# Altium PCB board.PcbDoc (part 2 of 2)
Units mil, origin at the board's own origin, x right, y up, seen from the top; angles counter-clockwise.
Board outline 6805.03 x 3220.03 mil, 2 copper layers (Top Layer, Bottom Layer); 97 components, 65 nets, 363 pads, 68 vias.
Unrouted connection lines stored in the file: 1.
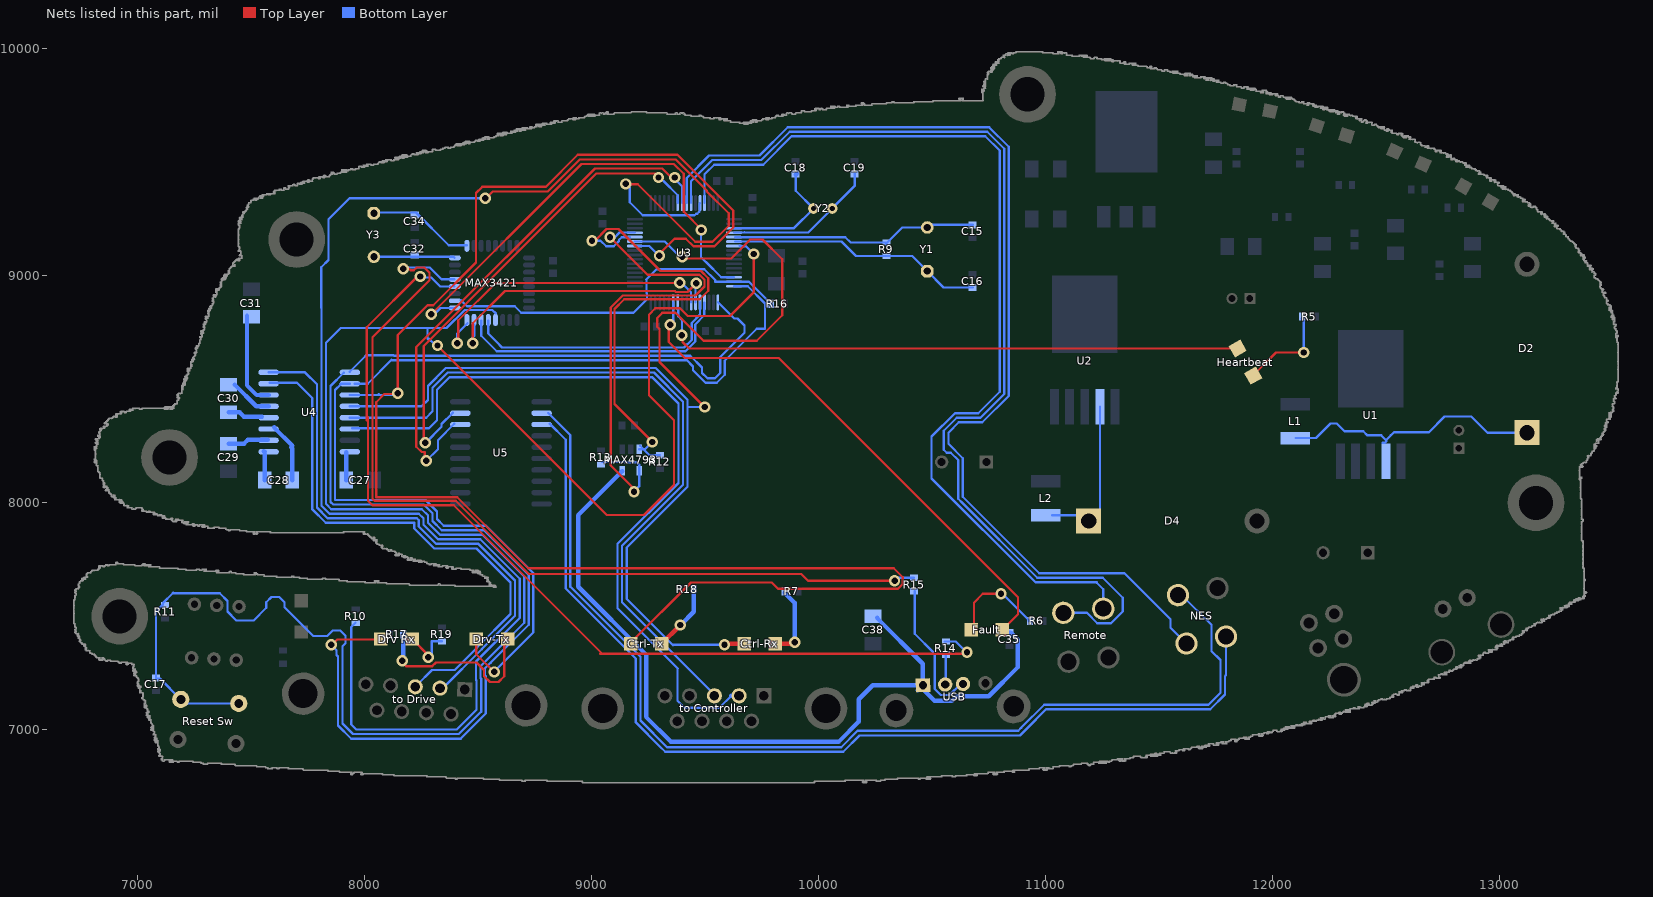
[diagram p2: the nets of this part, all layers, seen from the top]

## Via types
v1: diameter 50, hole 28, Top Layer to Bottom Layer, 68 vias

## Nets (pads, with @x,y where several pads share a name; then routed paths per layer and width w, separated by ;. In a path a pad name is that pad's centre, name@x,y a point inside that pad or via, vN(x,y) a via of type N, cw(c..) or ccw(c..) an arc to the next point about the centre after c; other vN are vias at no path point) (continued)
NetC15_2: C15.2 R9.1 U3.5 Y1.2 | length 1095.9
  Bottom Layer w10: U3.5@9631,9170 10117,9170 10140.47,9146.53 R9.1@10298,9146.53 ; R9.1@10297,9142 10368.06,9213.06 Y1.2@10474.06,9213.06 ; Y1.2@10474,9213 Y1.2@10474.06,9213.06 ; Y1.2@10478,9213.06 Y1.2@10474.06,9213.06 ; C15.2@10678,9224.56 10485.56,9224.56 Y1.2@10474.06,9213.06
NetC16_2: C16.2 R9.2 U3.6 Y1.1 | length 1133.5
  Bottom Layer w10: U3.6@9631,9151 10100,9151 10163.53,9087.47 R9.2@10298,9087.47 10411.53,9087.47 Y1.1@10480,9019 ; Y1.1@10478,9020.94 10549.94,8949 C16.2@10678,8949
NetC17_2: "Reset Sw.2" C17.2 MAX3421.12 R11.1 U3.7 | length 9159.5
  Top Layer w10: v1@8329,8683 9066,7946 9230,7946 9362,8078 9362,8364 9252,8474 9252,8829 9280,8857 9389,8857 9423,8823 9609,8823 9713,8927 v1(9713,9096)
  Bottom Layer w10: C17.2@7080,7227.56 7080,7521 7111,7552 7111,7559 7153.5,7601.5 ; C17.2@7085,7226 7097.36,7226 7189.29,7134.07 ; 7157,7605 7153.5,7601.5 ; 7213.78,7116.22 7444.57,7116.22 ; 7740.07,7446.07 7738.07,7448.07 ; 8281,8719 8276,8724 ; v1@8310,8696 8309,8696 8281,8724 8276,8724 ; 8578,8834 8562,8850 8440,8850 8360,8770 8276,8770 ; U3.7@9651,9133 9653,9131 9678,9131 v1(9713,9096) ; 7153.5,7601.5 7361.22,7601.5 7395.06,7567.66 7395.06,7520.94 7434,7482 7510.72,7482 7566,7537.28 7566,7561.57 7589.43,7585 7622.57,7585 7646,7561.57 7646,7540.13 7738.07,7448.07 ; 7738.07,7448.07 7772.57,7413.57 7834,7413.57 7858.43,7438 7891.57,7438 7915,7414.57 7915,7381.43 7901.84,7368.27 7901.84,7027.57 7948.29,6981.13 8413.84,6981.13 8512.44,7079.73 8512.44,7225.26 8510,7227.7 8510,7279.85 8702.16,7472.01 8702.16,7674.14 8517.14,7859.16 8331.14,7859.16 8278.16,7912.14 8278.16,7945.27 8251.2,7972.24 7852.43,7972.24 7829,7995.67 7829,8705 7894,8770 8276,8770 ; 8276,8724 8276,8770
  Bottom Layer w19.68: 7198,7132 7213.78,7116.22
  other v1: 8320,8693
NetC18_2: C18.2 U3.3 Y2.1 | length 566.2
  Bottom Layer w10: U3.3@9626.5,9210.27 9891.27,9210.27 Y2.1@9973,9292 ; C18.2@9899,9445 9899,9374.66 Y2.1@9976.66,9297
  Bottom Layer w19.68: C18.2@9899,9445 C18.2@9903,9449
NetC19_2: C19.2 U3.4 Y2.2 | length 678.7
  Bottom Layer w10: U3.4@9626.5,9190.58 9671.58,9190.58 ; 9665.91,9190.58 9671.58,9190.58 ; 9673,9192 9671.58,9190.58 ; Y2.2@10056,9294 10158,9396 C19.2@10158,9449.44 ; Y2.2@10057,9294 9953.58,9190.58 9671.58,9190.58
NetC28_1: C28.1 U4.1 | length 119.6
  Bottom Layer w19.68: U4.1@7555,8228 U4.1@7558.98,8224.02 ; C28.1@7558.98,8100 U4.1@7558.98,8214.02
NetC28_2: C28.2 U4.3 | length 261.7
  Bottom Layer w19.68: U4.3@7600,8332 7681.02,8250.98 ; 7676,8245 7681.02,8239.98 C28.2@7681.02,8100
NetC29_1: C29.1 U4.2 | length 180
  Bottom Layer w19.68: C29.1@7400,8261.02 7468.02,8261.02 7485,8278 U4.2@7573,8278
NetC30_1: C30.1 U4.4 | length 154.9
  Bottom Layer w19.68: C30.1@7400,8398.98 7448.02,8398.98 7467,8380 U4.4@7547,8380
NetC30_2: C30.2 U4.5 | length 189.6
  Bottom Layer w19.68: C30.2@7426,8521 7522,8425 U4.5@7575.87,8425
NetC31_2: C31.2 U4.6 | length 419.3
  Bottom Layer w19.68: C31.2@7481,8824 7481,8517 7523,8475 U4.6@7575.87,8475
NetC32_1: C32.1 MAX3421.24 Y3.2 | length 356.6
  Bottom Layer w10: Y3.2@8040,9083.94 8391.06,9083.94 MAX3421.24@8395,9080
NetC34_1: C34.1 MAX3421.25 Y3.1 | length 468.7
  Bottom Layer w10: Y3.1@8041,9279 8225,9279 8369.65,9134.35 MAX3421.25@8449.76,9134.35
NetC35_2: C35.2 C38.1 MAX4793.5 USB.1 | length 3803.5
  Bottom Layer w19.68: MAX4793.5@9134,8140 8940,7946 8940,7630.83 9239.09,7331.73 9239.09,7095 9239.09,7056.7 9347.48,6948.32 10088.78,6948.32 10176.69,7036.22 10176.69,7135 10237.65,7195.97 USB.1@10458.75,7195.97 ; C38.1@10257,7493 10458.75,7291.25 USB.1@10458.75,7195.97 ; USB.1@10436.33,7173.55 USB.1@10458.75,7195.97 ; USB.1@10454,7184 10509.93,7128.07 10586.67,7128.07 10606.67,7148.07 10749.26,7148.07 10877.56,7276.37 10877.56,7396.41 10846.41,7427.56 C35.2@10840,7427.56
NetCtrl-Rx_2: Ctrl-Rx.2 R7.2 | length 315.7
  Top Layer w19.68: Ctrl-Rx.2@9808.9,7380 9888,7380 v1@9889,7379
  Bottom Layer w19.68: R7.2@9850,7603 9894,7559 v1(9894,7386)
NetCtrl-Tx_2: Ctrl-Tx.2 R18.2 | length 295.4
  Top Layer w19.68: Ctrl-Tx.2@9308.9,7380 9387.9,7459 v1@9394,7459
  Bottom Layer w19.68: v1@9395,7465 9449.53,7519.53 R18.2@9449.53,7620
  other v1: 9390,7462
NetD2_2: D2.2 L1.1 U1.2 | length 1174
  Bottom Layer w10: L1.1@12100,8285.2 12190.2,8285.2 12255,8350 12281.88,8350 12316.28,8315.59 12398.99,8315.59 12417.43,8297.16 12477.84,8297.16 12500,8275 ; 12485,8265 12495,8265 12501,8271 12501,8278 12520.16,8297.16 12534.16,8311.16 12688.29,8311.16 12757.13,8380 12875,8380 12945.87,8309.13 D2.2@13120,8309.13
NetD4_2: D4.2 L2.1 U2.2 | length 596.2
  Bottom Layer w10: L2.1@11028,7945.2 D4.2@11170.2,7945.2 ; D4.2@11238.81,7968.81 U2.2@11238.81,8422.83
"NetDrv Rx_2": "Drv Rx.2" R19.2 | length 242.7
  Top Layer w10: 8208.9,7400 8281,7327.9 v1@8281,7314
  Bottom Layer w10: v1@8278,7316 8294.47,7332.47 8294.47,7390.47 R19.2@8340,7390.47
  other v1: 8280,7320
NetDrv-Tx_2: Drv-Tx.2 R17.2 | length 815.9
  Top Layer w10: v1@8163,7299 8182,7280 8296.57,7280 8313.57,7297 8491.87,7297 8525.16,7263.71 8525.16,7236.43 8551.43,7210.16 8588.57,7210.16 8614.84,7236.43 Drv-Tx.2@8614.84,7385.94
  Top Layer w19.68: Drv-Tx.2@8614.84,7385.94 Drv-Tx.2@8628.9,7400
  Bottom Layer w19.68: v1(8165,7305) 8169.53,7309.53 R17.2@8169.53,7420
NetFault_1: Fault.1 R6.1 | length 422.3
  Top Layer w10: Fault.1@10684,7446 10684,7560 10723,7599 v1(10803,7599)
  Bottom Layer w10: v1@10810,7598 v1@10810,7599 ; v1@10810,7600 v1@10810,7599 ; R6.1@10929,7480 v1@10810,7599
  Bottom Layer w19.68: v1@10809,7600 v1@10810,7599 ; R6.1@10929,7480 R6.1@10930.47,7480
NetFault_2: Fault.2 U3.27 | length 2351
  Top Layer w10: v1@9339,8779 9339,8709 9410,8638 9824,8638 10878,7584 10878,7509.1 Fault.2@10808.9,7440
  Bottom Layer w10: v1@9347,8785 9358.79,8796.79 U3.27@9358.79,8883.5
  other v1: 9346,8784
NetHeartbeat_1: Heartbeat.1 R5.1 | length 407.7
  Top Layer w10: Heartbeat.1@11921,8569 12014,8662 v1(12137,8662)
  Bottom Layer w10: R5.1@12127,8811 12137,8801 v1(12137,8662)
NetHeartbeat_2: Heartbeat.2 U3.26 | length 2600.1
  Top Layer w10: v1@9400,8733 9400,8709 9429.33,8679.67 Heartbeat.2@11836.33,8679.67
  Bottom Layer w10: U3.26@9381,8859 9381,8822 9397,8806 v1(9397,8738)
NetMAX3421_20: MAX3421.20 R14.1 | length 4314.6
  Top Layer w10: 8009,8363 8009,8774 v1@8239,9004 ; 8014,8377 8014,8009 8034,7989 8392,7989 9046,7335 ; 9037,7335 9046,7335 ; v1(10653,7342) 10646,7335 9046,7335
  Bottom Layer w10: v1@8252,8993 8293,8993 8332.75,8953.25 MAX3421.20@8394.65,8953.25 ; MAX3421.20@8388.08,8958.92 MAX3421.20@8390,8957 ; R14.1@10554,7389 10604,7389 10651,7342 v1(10653,7342)
  other v1: 8245,8997
NetMAX3421_21: MAX3421.21 R15.1 | length 4000.6
  Top Layer w10: v1@8181,9045 8201.85,9024.15 8215.58,9024.15 8228.43,9037 8261.57,9037 8285,9013.57 8285,8980.43 8034,8729.43 8034,8017.28 8042.28,8009 8400.28,8009 8722.64,7686.64 9923.36,7686.64 9953,7657 v1(10334,7657)
  Bottom Layer w10: v1@8174,9037 8286,9037 8338.25,8984.75 MAX3421.21@8394.65,8984.75 ; v1@10342,7662 10349.53,7669.53 R15.1@10420,7669.53
  other v1: 8170,9032
NetNES_1: NES.1 U3.57 | length 4680.3
  Bottom Layer w10: 9417,9427 9417,9429 ; U3.57@9417.84,9320.5 9417.84,9428.16 9417,9429 ; 10837,9532 10837,9527 ; NES.1@11620,7380 11550,7450 11550,7486.87 11347.08,7689.79 10971.12,7689.79 10634.53,8026.38 10634.53,8196.71 10571.16,8260.08 10571.16,8309.29 10616.71,8354.84 10720.75,8354.84 10837,8471.09 10837,9527 ; 9417,9429 9417,9430.28 9516.72,9530 9738.72,9530 9863.72,9655 10750.57,9655 10837,9568.57 10837,9527
NetNES_2: NES.2 U5.2 | length 4741.5
  Bottom Layer w10: U5.2@8808,8396 8904.84,8299.16 8904.84,7630.85 9214.25,7321.44 9214.25,7040.63 9331.41,6923.47 10099.07,6923.47 10170.92,6995.32 10378.88,6995.32 10379.56,6996 10879,6996 10892.63,7009.63 ; 10894.52,7012 10993.28,7110.76 11716.76,7110.76 11769.63,7163.63 11769.63,7307.18 11730.26,7346.55 11730.26,7462.74 NES.2@11599.75,7593.25
  Bottom Layer w19.68: NES.2@11582.4,7593.25 NES.2@11599.75,7593.25
NetNES_3: NES.3 U5.3 | length 4485
  Bottom Layer w10: U5.3@8814,8349 8884.84,8278.16 8884.84,7622.57 9194.25,7313.16 9194.25,7032.35 9300.8,6925.8 9323.13,6903.47 10107.36,6903.47 10179.21,6975.32 10886.6,6975.32 10912.63,7001.34 10912.63,7001.83 11001.56,7090.76 11725.05,7090.76 11789.63,7155.35 11789.63,7236.16 11794.47,7241 NES.3@11794.47,7410.76
NetR10_2: R10.2 U3.60 | length 7099.5
  Top Layer w10: v1@8533,9341 8564,9372 8805.72,9372 8946.72,9513 9369.85,9513 9507,9375.85 9507,9372 9603,9276 9603,9221 9532,9150 9456,9150 9202,9404 v1@9146,9404
  Bottom Layer w10: 7808,8860 7808,9038.01 7840,9070.01 7840,9249 7933,9342 v1(8530,9342) ; 7809,8874 7809,7987.38 7844.15,7952.24 8237.76,7952.24 8258.16,7931.84 8258.16,7903.86 8322.86,7839.16 8508.86,7839.16 8682.16,7665.86 8682.16,7492.87 8490,7300.72 8490,7219.42 8492.44,7216.98 8492.44,7088.01 8405.56,7001.13 7962,7001.13 7940,7023.13 7940,7453 R10.2@7959,7472 ; v1@9156,9402 9167,9391 9167,9324 9224.46,9266.54 9452.91,9266.54 9460.43,9274.07 9464.21,9274.07 9474.12,9283.97 9474.12,9317.72 U3.60@9476.9,9320.5
  other v1: 9150,9405
NetR14_2: R14.2 USB.2 | length 130.9
  Bottom Layer w10: USB.2@10559,7200 10560,7201 R14.2@10560,7330.47
NetR15_2: R15.2 USB.3 | length 624.3
  Bottom Layer w10: R15.2@10423,7612 10423,7422.73 10505,7340.73 ; 10505,7340 10510.62,7334.38 10510.62,7180.15 10537.86,7152.91 10576.38,7152.91 10625.62,7202.15 USB.3@10635.81,7202.15
NetRemote_2: Remote.2 U3.58 | length 4623.9
  Bottom Layer w10: U3.58@9437.53,9320.5 9437.53,9416.53 9449,9428 ; 9442.72,9422 9530.72,9510 9747,9510 9872,9635 10742.28,9635 10817,9560.28 10817,8479.37 10712.47,8374.84 10608.43,8374.84 10551.16,8317.57 10551.16,8233.39 10563.57,8220.98 10581.98,8220.98 10614.53,8188.43 10614.53,8018.09 10633.81,7998.81 10962.83,7669.79 11251.21,7669.79 11339,7582 11339,7521 11287.66,7469.66 11226.96,7469.66 11181.27,7515.35 Remote.2@11077.37,7515.35
NetRemote_4: Remote.4 U3.61 | length 4200.1
  Bottom Layer w10: U3.61@9496.58,9320.5 9496.58,9447.58 9503,9454 ; 9500,9451 9503,9454 ; 10497,8291.7 10497.05,8291.75 ; 10497,8292 10497.05,8291.95 10497.05,8291.75 ; 11223.21,7649.79 10954.55,7649.79 10497.05,8107.29 10497.05,8264 10497.05,8280.48 10497.05,8291.75 ; 11225,7649.79 11225,7648 11253.56,7619.44 Remote.4@11253.56,7533.87 ; 9503,9454 9539,9490 9755.28,9490 9880.28,9615 10734,9615 10797,9552 10797,8488.84 10703,8394.84 10600.14,8394.84 10497.05,8291.75
"Netto Controller_2": "to Controller.2" U4.14 | length 3508.9
  Bottom Layer w10: U4.14@7944,8328 8282,8328 8318.16,8364.16 8318.16,8498.29 8373.71,8553.84 9265.29,8553.84 9381.84,8437.29 9381.84,8087.71 9113.54,7819.41 9113.54,7535.46 9379,7270 ; 9377.83,7270.11 9377.83,7127.92 9408.95,7096.81 9562,7096.81 9615.11,7149.92
  Bottom Layer w19.68: 9615.11,7149.92 9649.06,7149.92 9635.08,7149.92
"Netto Controller_3": "to Controller.3" U4.13 | length 3221.2
  Bottom Layer w10: U4.13@7934.13,8375 8270.16,8375 8298.16,8403 8298.16,8506.57 8365.43,8573.84 9273.57,8573.84 9401.84,8445.57 9401.84,8079.43 9133.54,7811.13 9133.54,7561.46 9531,7164
"Netto Drive_2": "to Drive.2" U4.8 | length 2438.7
  Bottom Layer w10: U4.8@7575.87,8575 7735,8575 7740,8570 ; 7739,8572 7789,8522 7789,7979.1 7835.86,7932.24 8229.48,7932.24 8238.16,7923.56 8238.16,7895.57 8314.57,7819.16 8500.57,7819.16 8662.16,7657.57 8662.16,7502.44 8515.43,7355.71 8515.43,7354.43 8347,7186 8326,7186 ; 8342,7196 8342,7209
"Netto Drive_3": "to Drive.3" U4.7 | length 2419.4
  Bottom Layer w10: U4.7@7580,8529 7701,8529 7769,8461 7769,7970.82 7827.58,7912.24 8218.16,7912.24 8218.16,7887.29 8306.29,7799.16 8492.29,7799.16 8642.16,7649.29 8642.16,7510.73 8495.43,7364 8495.43,7362.71 8395.72,7263 8296,7263 8229,7196 ; U4.7@7593,8529 U4.7@7593.25,8529
  Bottom Layer w19.68: 8226,7194 8226,7201.98
NetU3_55: U3.55 U5.19 | length 2089.2
  Top Layer w10: v1@8260,8269 8260,8691 9020,9451 9280,9451 v1@9287,9444
  Bottom Layer w10: v1(8267,8264) 8338.16,8335.16 8338.16,8347.16 U5.19@8388,8397 ; v1@9278,9433 v1(9294,9433) ; 9316,9418 9378.47,9355.53 U3.55@9378.47,9320.5
NetU3_56: U3.56 U5.18 | length 2336
  Top Layer w10: v1@8264,8182 8264,8223.14 8263.14,8224 8250.43,8224 8227,8247.43 8227,8686.28 9013.72,9473 9310.57,9473 9350.57,9433 v1(9365,9433)
  Bottom Layer w10: v1(8271,8185) 8322,8236 8322,8276 U5.18@8394,8348 ; v1@9369,9423 9398.16,9393.84 U3.56@9398.16,9320.5
PA0-SPI-GPX: MAX3421.17 U3.14 | length 2092.7
  Top Layer w10: v1(8293,8831) 8955,9493 9361.57,9493 9405,9449.57 9405,9283 v1@9489,9199
  Bottom Layer w10: v1@8303,8828 8333.76,8858.76 MAX3421.17@8394.65,8858.76 ; v1@9485,9197 9481,9193 9481,9082 9502,9061 9503,9061 9570.27,8993.73 U3.14@9626.5,8993.73
  other v1: 9482,9202
PA1-SPI-INT: MAX3421.18 R16.1 U3.15 | length 1596.3
  Bottom Layer w10: MAX3421.18@8422,8894 8450,8866 8660.4,8866 8689.47,8836.94 9183.94,8836.94 9243.46,8896.46 9243.46,8922.97 ; 9238.75,8983.89 9239.61,8983.89 9241.07,8985.36 ; 9241.07,8923.3 9241.07,8985.36 ; 9241.07,8986.07 9241.07,8985.36 ; R16.1@9790,8877 9692.95,8974.05 U3.15@9626.5,8974.05 9543.51,8974.05 9543.51,8981.49 9496,9029 9284.72,9029 9241.07,8985.36
PA2-TX-2: Drv-Tx.1 U3.16 U4.10 | length 4599.8
  Top Layer w10: Drv-Tx.1@8491.1,7400 8491.1,7332.9 v1@8572,7252
  Bottom Layer w10: U4.10@7894.24,8525 U4.10@7897,8525 ; U4.10@7934.13,8525 7905,8525 U4.10@7897,8525 ; U4.10@7956,8525 8013,8525 8118,8630 8120,8628 9419.03,8628 9446.29,8600.74 9446.29,8583.86 9501.15,8529 9550.85,8529 9586,8564.15 9586,8626 9727,8767 9762,8767 ; 8170.27,8012.24 8164,8012.24 ; v1@8569,7256 8742.16,7429.16 8742.16,7690.71 8533.71,7899.16 8347.71,7899.16 8318.16,7928.71 8318.16,7961.84 8267.76,8012.24 8164,8012.24 ; U3.16@9626.5,8954.36 9687.33,8954.36 9763,8878.69 9763,8767 ; U4.10@7897,8525 7869,8497 7869,8012.24 8164,8012.24
  other v1: 8570,7255
PA3-RX-2: "Drv Rx.1" U3.17 U4.9 | length 5763.8
  Top Layer w10: v1@7863,7382 7879,7398 8053,7398
  Bottom Layer w10: v1@7852,7374 7875,7351 7875,7330 7881.84,7323.16 7881.84,7019.29 7940,6961.13 8422.13,6961.13 8532.44,7071.44 8532.44,7235.99 8530,7238.43 8530,7271.57 8553.43,7295 8554.28,7295 8722.16,7462.87 8722.16,7682.43 8525.43,7879.16 8339.43,7879.16 8298.16,7920.43 8298.16,7953.56 8259.48,7992.24 8134,7992.24 ; U4.9@7907,8573 7849,8515 7849,8003.95 7860.72,7992.24 8134,7992.24 ; U4.9@7934,8578 8002,8646 ; 8001,8646 8005,8650 8126.28,8650 8128.28,8648 9433.87,8648 9486,8595.87 9486,8572.43 9509.43,8549 9542.57,8549 9566,8572.43 9566,8642 9673,8749 9673,8781 9642,8812 9627.13,8812 U3.17@9555.64,8883.5 ; 8161.98,7992.24 8134,7992.24
  other v1: 7852,7375
PA4-SPI-SS: MAX3421.14 U3.20 | length 1243.3
  Bottom Layer w10: MAX3421.14@8512.76,8803.65 8512.76,8736.24 8581,8668 9413,8668 9456,8711 9456,8786 9496,8826 U3.20@9496,8881
PA5-SPI-SCLK: MAX3421.13 U3.21 | length 1179.1
  Bottom Layer w10: MAX3421.13@8544.25,8803.65 8544.25,8745.75 8599,8691 ; 8595,8693 8604,8684 9406.37,8684 9440,8717.63 9440,8792.63 9476.9,8829.53 U3.21@9476.9,8883.5
PA6-SPI-MISO: MAX3421.15 U3.22 | length 1302.5
  Top Layer w10: v1@8476,8709 8476,8791 8618,8933 9366.43,8933 9370.43,8929 9422,8929 v1(9461,8968)
  Bottom Layer w10: v1(8476,8703) 8476,8730 8483,8737 MAX3421.15@8483,8786 ; v1@9456,8956 9457.21,8954.79 U3.22@9457.21,8883.5
PA7-SPI-MOSI: MAX3421.16 U3.23 | length 1330.8
  Top Layer w10: v1@8412,8716 8412,8804 8577,8969 v1(9387,8969)
  Bottom Layer w10: v1(8407,8703) 8407,8746 MAX3421.16@8452,8791 ; v1@9403,8962 9437.53,8927.47 U3.23@9437.53,8883.5
PA9-TX-1: Ctrl-Tx.1 U3.42 U4.11 | length 7524.5
  Top Layer w10: v1(8145,8483) 8145,8739.57 8276.43,8871 8302,8871 8490,9059 8490,9364.57 8517.43,9392 8797.43,9392 8938.43,9533 9378.14,9533 9623,9288.14 9623,9212.72 9540.28,9130 9447.72,9130 9413.91,9163.81 9364.81,9163.81 v1@9295,9094 ; v1@8152,8479 8086,8479 8050,8443 8050,8025 8406.91,8025 8719.91,7712 10329.91,7712 10370,7671.91 10370,7642.09 10348.91,7621 9820.91,7621 9792.91,7649 9437,7649 9171.1,7383.1 Ctrl-Tx.1@9171.1,7380
  Bottom Layer w10: U4.11@7934.13,8475 8059,8475 ; 8062,8478 8059,8475 ; v1@8141,8489 8127,8475 8059,8475 ; U3.42@9189.5,9131.53 9253.47,9131.53 v1@9293,9092
  other v1: 9298,9088
PA10-RX-1: Ctrl-Rx.1 U3.43 U4.12 | length 5458.7
  Top Layer w10: v1@9409,9082 9415,9076 9614,9076 9698,9160 9752,9160 9839,9073 9839,8826 9727,8714 9492,8714 9369,8837 9311,8837 9288,8814 9288,8776 9298,8766 9298,8621 v1(9497,8422)
  Top Layer w19.68: v1@9585,7380 Ctrl-Rx.1@9671.1,7380
  Bottom Layer w10: U4.12@7934.13,8425 8250,8425 8278.16,8453.16 8278.16,8514.86 ; 8278.16,8486.87 8278.16,8514.86 ; U3.43@9189.5,9151.21 9321.79,9151.21 v1@9389,9084 ; 9356.9,7375 v1(9585,7375) ; 9358,7372 9153.54,7576.46 9153.54,7802.84 9421.84,8071.14 9421.84,8422 ; v1@9494,8420 9492,8422 9421.84,8422 ; 8278.16,8514.86 8357.14,8593.84 9281.86,8593.84 9421.84,8453.86 9421.84,8422
  other v1: 9399,9084
PA11-VBUS5V: MAX4793.3 R12.1 U3.44 | length 2152.7
  Top Layer w10: v1(9001,9155) 9014.09,9155 9065.09,9206 9118,9206 9303,9021 9481.54,9021 9513,8989.54 9513,8934.23 9475.77,8897 9143,8897 9100,8854 9100,8435 v1(9267,8268) v1@9275,8260
  Bottom Layer w10: v1(9001,9155) 9038.43,9155 9063.43,9130 9096.57,9130 9120,9153.43 9120,9158.58 9132,9170.58 9166.42,9170.58 U3.44@9167,9170 ; MAX4793.3@9208.53,8236 9228,8236 ; MAX4793.3@9213,8251 9228,8236 ; v1@9260,8262 9234,8236 9228,8236 ; R12.1@9299.47,8210.53 9253.47,8210.53 9228,8236
PA12-VBUS0L: MAX4793.4 R13.1 U3.45 | length 2267.2
  Top Layer w10: v1@9080,9151 v1(9080,9170) 9245,9005 9474.91,9005 9497,8982.91 9497,8953.09 9456.91,8913 9136,8913 9084,8861 9084,8164 v1@9198,8050
  Bottom Layer w10: R13.1@9046,8180 9144.16,8180 9144.82,8179.35 9198,8179.35 9208.53,8168.82 MAX4793.4@9208.53,8141.51 9208.53,8073.53 v1@9193,8058 ; v1@9070,9165 9097,9165 9122.58,9190.58 U3.45@9189.5,9190.58
  other v1: 9186,8049
VCC: C27.1 U4.16 | length 122
  Bottom Layer w19.68: C27.1@7918.98,8100 U4.16@7918.98,8221.98
pads on no net: "24v in.3" "24v in.4" "alim out.5" "Boot0 Sw.5" "to Controller.1" "to Controller.4" "to Controller.6" "to Controller.7" "to Controller.8" "to Controller.9" "to Controller.10" "to Controller.11" "to Drive.1" "to Drive.4" "to Drive.6" "to Drive.7" "to Drive.8" "to Drive.9" "to Drive.10" "to Drive.11" MAX3421.1 MAX3421.4 MAX3421.5 MAX3421.6 MAX3421.7 MAX3421.8 MAX3421.9 MAX3421.10 MAX3421.11 MAX3421.22 MAX3421.26 MAX3421.27 MAX3421.28 MAX3421.29 MAX3421.30 MAX3421.31 MAX3421.32 U3.2 U3.8 U3.9 U3.10 U3.11 U3.24 U3.25 U3.29 U3.30 U3.33 U3.34 U3.35 U3.36 U3.37 U3.38 U3.39 U3.40 U3.41 U3.46 U3.49 U3.50 U3.51 U3.52 U3.53 U3.54 U3.59 U3.62 U5.4 U5.5 U5.6 U5.7 U5.8 U5.9 U5.12 U5.13 U5.14 U5.15 U5.16 U5.17 USB.5 USB.6

## Polygon pours and split planes (outlines as drawn)
GND on Top Layer "Ground-plane" (solid, pour order 1000): 207 vertices, not listed, extent 6765,6800 13475,9955

## Silkscreen, mask and mechanical layers (free items; w line width, h text height)
Top Overlay:
  drawing of 3459 lines, arcs and shapes, not listed
  text "d" at 12871.91,9203.18 h124.11
  text "," at 13285.3,8966.96 h124.11
  text "Rx" at 7904,7373 h60
  text "Tx" at 8714,7365 h60
  text "Tx" at 8983,7357 h60
  text "Rx" at 9934,7357 h60
Mechanical 1:
  text "T" at 10826.08,9498.96 h124.11
  text "r" at 10894.97,9498.96 h124.11
  text "a" at 10924.5,9498.96 h124.11
  text "c" at 10983.56,9498.96 h124.11
  text "k" at 11042.61,9498.96 h124.11
  text "W" at 11190.25,9498.96 h124.11
  text "i" at 11298.52,9498.96 h124.11
  text "d" at 11318.2,9498.96 h124.11
  text "t" at 11377.26,9498.96 h124.11
  text "h" at 11406.78,9498.96 h124.11
  text "=" at 11465.84,9498.96 h124.11
  text "5" at 11672.53,9498.96 h124.11
  text "," at 11731.59,9498.96 h124.11
  text "0" at 11761.11,9498.96 h124.11
  text "0" at 11820.17,9498.96 h124.11
  text "0" at 11879.23,9498.96 h124.11
  text "m" at 11967.81,9498.96 h124.11
  text "i" at 12046.55,9498.96 h124.11
  text "l" at 12066.23,9498.96 h124.11
  text "s" at 12085.92,9498.96 h124.11
  text "(" at 12164.66,9498.96 h124.11
  text "1" at 12223.71,9498.96 h124.11
  text "0" at 12282.77,9498.96 h124.11
  text "5" at 12341.82,9498.96 h124.11
  text "0" at 12400.88,9498.96 h124.11
  text "7" at 12459.93,9498.96 h124.11
  text "," at 12518.99,9498.96 h124.11
  text "4" at 12548.52,9498.96 h124.11
  text "6" at 12607.57,9498.96 h124.11
  text "2" at 12666.63,9498.96 h124.11
  text "m" at 12755.21,9498.96 h124.11
  text "i" at 12833.95,9498.96 h124.11
  text "l" at 12853.63,9498.96 h124.11
  text "s" at 12873.32,9498.96 h124.11
  text "," at 12922.53,9498.96 h124.11
  text "9" at 13011.11,9498.96 h124.11
  text "1" at 13070.17,9498.96 h124.11
  text "8" at 13129.23,9498.96 h124.11
  text "4" at 13188.28,9498.96 h124.11
  text "," at 13247.34,9498.96 h124.11
  text "9" at 13276.86,9498.96 h124.11
  text "0" at 13335.92,9498.96 h124.11
  text "0" at 13394.97,9498.96 h124.11
  text "m" at 13483.56,9498.96 h124.11
  text "i" at 13562.3,9498.96 h124.11
  text "l" at 13581.98,9498.96 h124.11
  text "s" at 13601.67,9498.96 h124.11
  text ")" at 13650.88,9498.96 h124.11
  text "(" at 13680.41,9498.96 h124.11
  text "1" at 13739.46,9498.96 h124.11
  text "0" at 13798.52,9498.96 h124.11
  text "5" at 13857.57,9498.96 h124.11
  text "9" at 13916.63,9498.96 h124.11
  text "7" at 13975.68,9498.96 h124.11
  text "," at 14034.74,9498.96 h124.11
  text "2" at 14064.26,9498.96 h124.11
  text "0" at 14123.32,9498.96 h124.11
  text "0" at 14182.37,9498.96 h124.11
  text "m" at 14270.96,9498.96 h124.11
  text "i" at 14349.7,9498.96 h124.11
  text "l" at 14369.38,9498.96 h124.11
  text "s" at 14389.07,9498.96 h124.11
  text "," at 14438.28,9498.96 h124.11
  text "9" at 14526.86,9498.96 h124.11
  text "1" at 14585.92,9498.96 h124.11
  text "8" at 14644.97,9498.96 h124.11
  text "4" at 14704.03,9498.96 h124.11
  text "," at 14763.08,9498.96 h124.11
  text "9" at 14792.61,9498.96 h124.11
  text "0" at 14851.67,9498.96 h124.11
  text "0" at 14910.72,9498.96 h124.11
  text "m" at 14999.3,9498.96 h124.11
  text "i" at 15078.04,9498.96 h124.11
  text "l" at 15097.73,9498.96 h124.11
  text "s" at 15117.41,9498.96 h124.11
  text ")" at 15166.63,9498.96 h124.11
  text "T" at 15294.58,9498.96 h124.11
  text "o" at 15363.48,9498.96 h124.11
  text "p" at 15422.53,9498.96 h124.11
  text "O" at 15511.11,9498.96 h124.11
  text "v" at 15589.86,9498.96 h124.11
  text "e" at 15648.91,9498.96 h124.11
  text "r" at 15707.97,9498.96 h124.11
  text "l" at 15737.49,9498.96 h124.11
  text "a" at 15757.18,9498.96 h124.11
  text "y" at 15816.23,9498.96 h124.11
  text "T" at 10828.48,9497.96 h124.11
  text "r" at 10897.37,9497.96 h124.11
  text "a" at 10926.9,9497.96 h124.11
  text "c" at 10985.96,9497.96 h124.11
  text "k" at 11045.01,9497.96 h124.11
  text "W" at 11192.65,9497.96 h124.11
  text "i" at 11300.92,9497.96 h124.11
  text "d" at 11320.6,9497.96 h124.11
  text "t" at 11379.66,9497.96 h124.11
  text "h" at 11409.18,9497.96 h124.11
  text "=" at 11468.24,9497.96 h124.11
  text "5" at 11674.93,9497.96 h124.11
  text "," at 11733.99,9497.96 h124.11
  text "0" at 11763.51,9497.96 h124.11
  text "0" at 11822.57,9497.96 h124.11
  text "0" at 11881.63,9497.96 h124.11
  text "m" at 11970.21,9497.96 h124.11
  text "i" at 12048.95,9497.96 h124.11
  text "l" at 12068.63,9497.96 h124.11
  text "s" at 12088.32,9497.96 h124.11
  text "(" at 12167.06,9497.96 h124.11
  text "1" at 12226.11,9497.96 h124.11
  text "0" at 12285.17,9497.96 h124.11
  text "5" at 12344.22,9497.96 h124.11
  text "0" at 12403.28,9497.96 h124.11
  text "7" at 12462.33,9497.96 h124.11
  text "," at 12521.39,9497.96 h124.11
  text "4" at 12550.92,9497.96 h124.11
  text "6" at 12609.97,9497.96 h124.11
  text "2" at 12669.03,9497.96 h124.11
  text "m" at 12757.61,9497.96 h124.11
  text "i" at 12836.35,9497.96 h124.11
  text "l" at 12856.03,9497.96 h124.11
  text "s" at 12875.72,9497.96 h124.11
  text "," at 12924.93,9497.96 h124.11
  text "9" at 13013.51,9497.96 h124.11
  text "1" at 13072.57,9497.96 h124.11
  text "8" at 13131.63,9497.96 h124.11
  text "4" at 13190.68,9497.96 h124.11
  text "," at 13249.74,9497.96 h124.11
  text "9" at 13279.26,9497.96 h124.11
  text "0" at 13338.32,9497.96 h124.11
  text "0" at 13397.37,9497.96 h124.11
  text "m" at 13485.96,9497.96 h124.11
  text "i" at 13564.7,9497.96 h124.11
  text "l" at 13584.38,9497.96 h124.11
  text "s" at 13604.07,9497.96 h124.11
  text ")" at 13653.28,9497.96 h124.11
  text "(" at 13682.81,9497.96 h124.11
  text "1" at 13741.86,9497.96 h124.11
  text "0" at 13800.92,9497.96 h124.11
  text "5" at 13859.97,9497.96 h124.11
  text "9" at 13919.03,9497.96 h124.11
  text "7" at 13978.08,9497.96 h124.11
  text "," at 14037.14,9497.96 h124.11
  text "2" at 14066.66,9497.96 h124.11
  text "0" at 14125.72,9497.96 h124.11
  text "0" at 14184.77,9497.96 h124.11
  text "m" at 14273.36,9497.96 h124.11
  text "i" at 14352.1,9497.96 h124.11
  text "l" at 14371.78,9497.96 h124.11
  text "s" at 14391.47,9497.96 h124.11
  text "," at 14440.68,9497.96 h124.11
  text "9" at 14529.26,9497.96 h124.11
  text "1" at 14588.32,9497.96 h124.11
  text "8" at 14647.37,9497.96 h124.11
  text "4" at 14706.43,9497.96 h124.11
  text "," at 14765.48,9497.96 h124.11
  text "9" at 14795.01,9497.96 h124.11
  text "0" at 14854.07,9497.96 h124.11
  text "0" at 14913.12,9497.96 h124.11
  text "m" at 15001.7,9497.96 h124.11
  text "i" at 15080.44,9497.96 h124.11
  text "l" at 15100.13,9497.96 h124.11
  text "s" at 15119.81,9497.96 h124.11
  text ")" at 15169.03,9497.96 h124.11
  text "T" at 15296.98,9497.96 h124.11
  text "o" at 15365.88,9497.96 h124.11
  text "p" at 15424.93,9497.96 h124.11
  text "O" at 15513.51,9497.96 h124.11
  text "v" at 15592.26,9497.96 h124.11
  text "e" at 15651.31,9497.96 h124.11
  text "r" at 15710.37,9497.96 h124.11
  text "l" at 15739.89,9497.96 h124.11
  text "a" at 15759.58,9497.96 h124.11
  text "y" at 15818.63,9497.96 h124.11
  text "Y" at 10826.08,9262.74 h124.11
  text "1" at 10894.97,9262.74 h124.11
  text "8" at 11190.25,9262.74 h124.11
  text "M" at 11249.3,9262.74 h124.11
  text "H" at 11337.89,9262.74 h124.11
  text "z" at 11416.63,9262.74 h124.11
  text "(" at 11495.37,9262.74 h124.11
  text "H" at 11524.89,9262.74 h124.11
  text "C" at 11603.63,9262.74 h124.11
  text "-" at 11672.53,9262.74 h124.11
  text "4" at 11702.06,9262.74 h124.11
  text "9" at 11761.11,9262.74 h124.11
  text "U" at 11820.17,9262.74 h124.11
  text ")" at 11898.91,9262.74 h124.11
  text "B" at 15294.58,9262.74 h124.11
  text "o" at 15363.48,9262.74 h124.11
  text "t" at 15422.53,9262.74 h124.11
  text "t" at 15452.06,9262.74 h124.11
  text "o" at 15481.59,9262.74 h124.11
  text "m" at 15540.64,9262.74 h124.11
  text "L" at 15648.91,9262.74 h124.11
  text "a" at 15707.97,9262.74 h124.11
  text "y" at 15767.02,9262.74 h124.11
  text "e" at 15816.23,9262.74 h124.11
  text "r" at 15875.29,9262.74 h124.11
  text "Y" at 10828.48,9261.74 h124.11
  text "1" at 10897.37,9261.74 h124.11
  text "8" at 11192.65,9261.74 h124.11
  text "M" at 11251.7,9261.74 h124.11
  text "H" at 11340.29,9261.74 h124.11
  text "z" at 11419.03,9261.74 h124.11
  text "(" at 11497.77,9261.74 h124.11
  text "H" at 11527.29,9261.74 h124.11
  text "C" at 11606.03,9261.74 h124.11
  text "-" at 11674.93,9261.74 h124.11
  text "4" at 11704.46,9261.74 h124.11
  text "9" at 11763.51,9261.74 h124.11
  text "U" at 11822.57,9261.74 h124.11
  text ")" at 11901.31,9261.74 h124.11
  text "B" at 15296.98,9261.74 h124.11
  text "o" at 15365.88,9261.74 h124.11
  text "t" at 15424.93,9261.74 h124.11
  text "t" at 15454.46,9261.74 h124.11
  text "o" at 15483.99,9261.74 h124.11
  text "m" at 15543.04,9261.74 h124.11
  text "L" at 15651.31,9261.74 h124.11
  text "a" at 15710.37,9261.74 h124.11
  text "y" at 15769.42,9261.74 h124.11
  text "e" at 15818.63,9261.74 h124.11
  text "r" at 15877.69,9261.74 h124.11

## Text inside footprints (layer, text, board x,y; h text height)
C2: Bottom Overlay "+" at 12790.47,8123.5 h59.06 r270
C6: Bottom Overlay "+" at 12574.88,7750.47 h59.06
C9: Bottom Overlay "+" at 12016.5,8870.47 h59.06
C10: Bottom Overlay "+" at 10894.53,8150.47 h59.06
"to Controller": Top Overlay "9" at 9396.1,6915.87 h59.06 r180; Top Overlay "6" at 9723.27,6915.87 h59.06 r180
"to Drive": Top Overlay "6" at 8393.27,6946.01 h59.06 r177; Top Overlay "9" at 8066.55,6963.13 h59.06 r177